# EAGLE board microconnectorV2 (EAGLE 6.1)
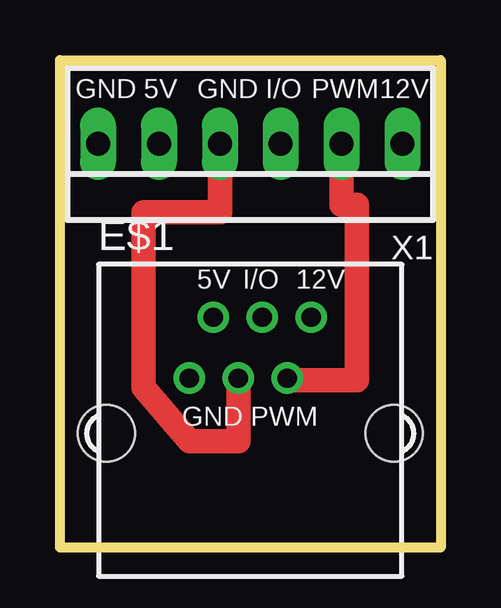
[diagram p0: board, top side]
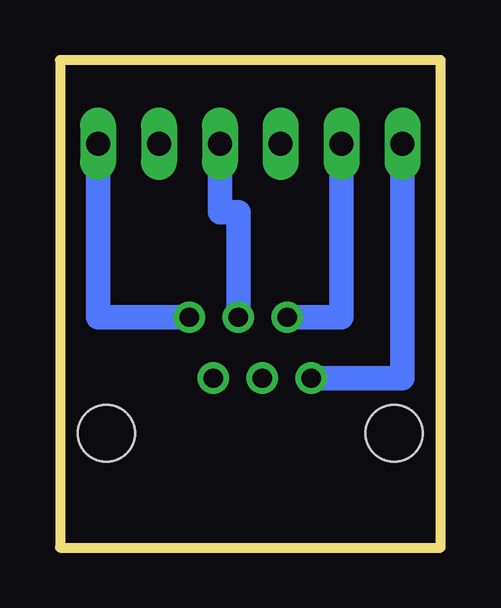
[diagram p1: board, bottom side, seen from below]

Size 15.88 x 20.32 mm. Coordinates in mm from the lower left corner, seen from the top.
Outline: 0,20.32 15.88,20.32 15.88,0 0,0 0,20.32
Copper layers (1*16): Top 0.035mm / dielectric 1.5mm / Bottom 0.035mm
Design rules: minimum track width 10mil, minimum drill 24mil, track to track 8mil, track to pad 8mil, pad to pad 8mil, via to via 8mil, smd to smd 8mil, copper to edge 40mil, drill to drill 8mil, minimum pad ring 10mil, minimum via ring 8mil, stop-mask expansion 4mil, vias tented up to drill 0mil, thermal gap 10mil
Net classes: 0 default: width 0.457 mm; 1 power: width 0.914 mm
Milling: 4 lines

## Footprints (pad centres in the part's own frame; a part is rotated, then mirrored left to right if it is on the bottom)
YH-55-10 = drill 0.8 pad 1.3: 1 -2.54,2.3; 2 -1.54,4.84; 3 -0.5,2.3; 4 0.5,4.84; 5 1.54,2.3; 6 2.54,4.84 | hole 2.36: -6,0; 6,0
22-23-2061 = drill 1 long: 1 -6.35,0; 2 -3.81,0; 3 -1.27,0; 4 1.27,0; 5 3.81,0; 6 6.35,0

## Placement (x,y rotation side)
E$1  [YH-55-10]  7.94,4.76 0 top
X1  [22-23-2061]  7.94,16.83 180 top

## Library data of the parts
E$1 = lpatiny
X1 = con-molex; MF: MOLEX; MPN: 22-23-2061; OC_FARNELL: 1462922; OC_NEWARK: 27C1933

## Nets
S$1: E$1.1 X1.6
S$2: E$1.2 X1.5
S$3: E$1.3 X1.4
S$4: E$1.4 X1.3
S$5: E$1.5 X1.2
S$6: E$1.6 X1.1

## Tracks (layer width: path | path; a pad name or v marks a point on that pad's centre or on a via)
S$1
  Bottom 1.016: E$1.1 1.59,7.06 X1.6
S$2
  Bottom 1.016: E$1.2 4.13,9.6 X1.5
S$3
  Top 1.016: X1.4 6.67,13.97 3.49,13.97 3.49,6.67 5.4,4.45 7.44,4.45 E$1.3
S$4
  Bottom 1.016: X1.3 9.21,13.97 8.44,13.97 E$1.4
S$5
  Top 1.016: X1.2 11.75,14.29 12.38,14.29 12.38,6.99 9.48,6.99 E$1.5
S$6
  Bottom 1.016: E$1.6 14.29,9.6 X1.1

## Text on the board
tPlace: GND | 5V | GND | I/O | PWM | 12V